# EAGLE board sensors_board (EAGLE 7.7.0)
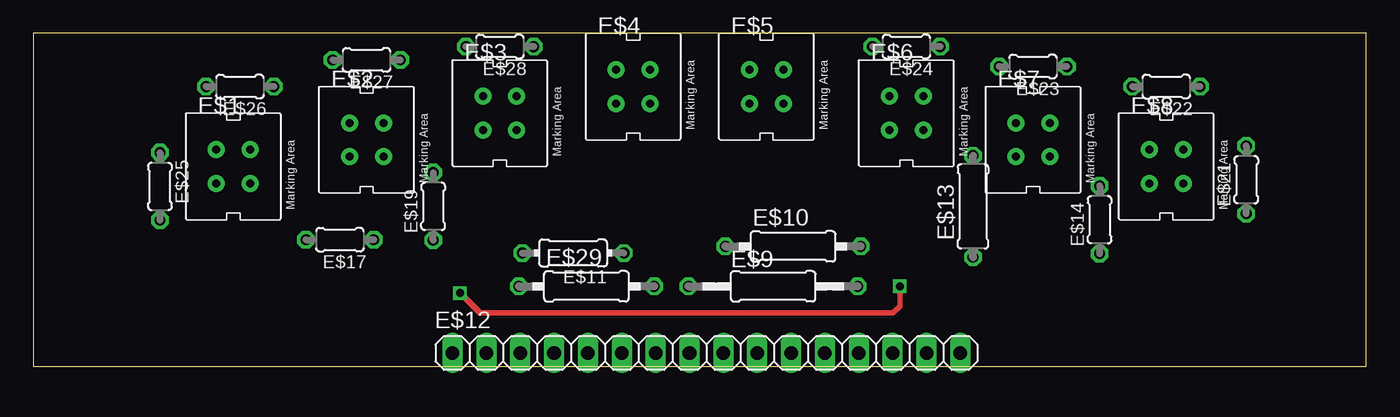
[diagram p0: board, top side]
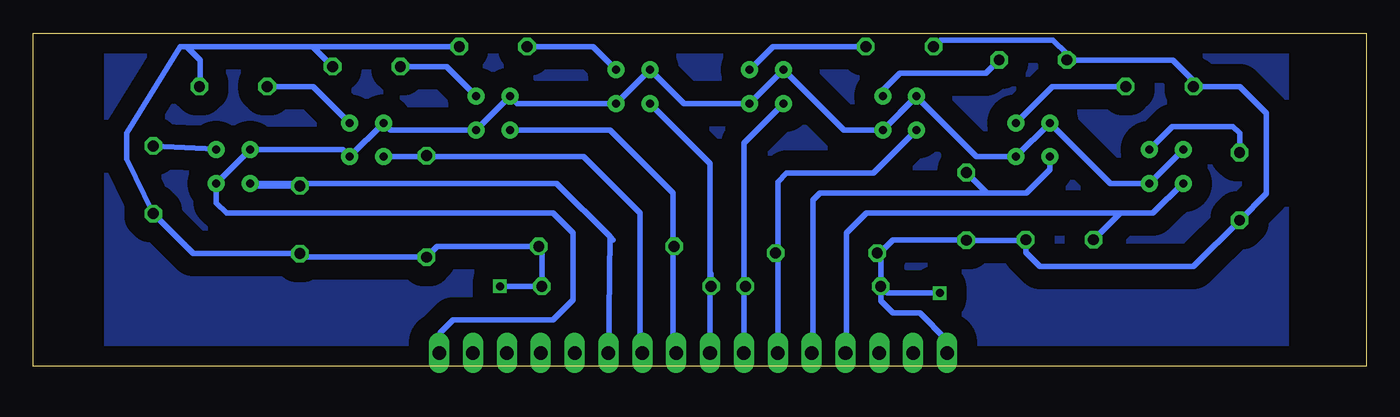
[diagram p1: board, bottom side, seen from below]

Size 100 x 25 mm. Coordinates in mm from the lower left corner, seen from the top.
Outline: 0,0 100,0 100,25 0,25 0,0
Copper layers (1*16): Top 0.035mm / dielectric 1.5mm / Bottom 0.035mm
Design rules "default": minimum track width 10mil, minimum drill 24mil, track to track 8mil, track to pad 8mil, pad to pad 8mil, via to via 8mil, smd to smd 8mil, copper to edge 40mil, drill to drill 8mil, minimum pad ring 10mil, minimum via ring 8mil, stop-mask expansion 4mil, vias tented up to drill 0mil, thermal gap 10mil

## Footprints (pad centres in the part's own frame; a part is rotated, then mirrored left to right if it is on the bottom)
4 = drill 0.61 pad 1.27: A -1.27,1.27; C 1.27,-1.27; E 1.27,1.27; K -1.27,-1.27
0207/12 = drill 0.813 octagon: 1 -6.35,0; 2 6.35,0
0207/10 = drill 0.813 octagon: 1 -5.08,0; 2 5.08,0
0204/7 = drill 0.813 octagon: 1 -3.81,0; 2 3.81,0
1X16 = drill 1.016 long: 1 -19.05,0; 2 -16.51,0; 3 -13.97,0; 4 -11.43,0; 5 -8.89,0; 6 -6.35,0; 7 -3.81,0; 8 -1.27,0; 9 1.27,0; 10 3.81,0; 11 6.35,0; 12 8.89,0; 13 11.43,0; 14 13.97,0; 15 16.51,0; 16 19.05,0
0207/7 = drill 0.813 octagon: 1 -3.81,0; 2 3.81,0
0204/5 = drill 0.813 octagon: 1 -2.54,0; 2 2.54,0

## Placement (x,y rotation side)
E$1  [4]  15,15 0 top
E$2  [4]  25,17 0 top
E$3  [4]  35,19 0 top
E$4  [4]  45,21 0 top
E$5  [4]  55,21 0 top
E$6  [4]  65.5,19 0 top
E$7  [4]  75,17 0 top
E$8  [4]  85,15 0 top
E$9  [0207/12]  55.5,6 0 top
E$10  [0207/10]  57,9 0 top
E$11  [0204/7]  40.5,8.5 180 top
E$12  [1X16]  50.5,1 0 top
E$13  [0207/7]  70.5,12 90 top
E$14  [0204/5]  80,11 90 top
E$17  [0204/5]  23,9.5 180 top
E$19  [0204/5]  30,12 90 top
E$21  [0204/5]  91,14 90 top
E$22  [0204/5]  85,21 180 top
E$23  [0204/5]  75,22.5 180 top
E$24  [0204/5]  65.5,24 180 top
E$25  [0204/5]  9.5,13.5 270 top
E$26  [0204/5]  15.5,21 180 top
E$27  [0204/5]  25,23 180 top
E$28  [0204/5]  35,24 180 top
E$29  [0207/10]  41.5,6 0 top

## Library data of the parts
E$1-E$8 = cny70
E$9-E$11 E$13 E$14 E$17 E$19 E$21-E$29 = rcl
E$12 = pinhead

## Nets
S$1: E$1.A E$1.C E$2.A E$2.C E$3.A E$3.C E$4.A E$4.C E$5.A E$5.C E$6.A E$6.C E$7.A E$7.C E$8.A E$8.C E$12.16
S$2: E$1.E E$25.1
S$3: E$2.E E$26.1
S$4: E$3.E E$27.1
S$5: E$4.E E$28.1
S$7: E$5.E E$24.2
S$8: E$6.E E$23.2
S$9: E$7.E E$22.2
S$10: E$8.E E$21.2
S$12: E$1.K E$12.4 E$17.2
S$13: E$2.K E$12.5 E$19.2
S$14: E$3.K E$11.1 E$12.6
S$15: E$4.K E$12.7 E$29.2
S$16: E$5.K E$9.1 E$12.8
S$17: E$6.K E$10.1 E$12.9
S$18: E$7.K E$12.10 E$13.2
S$19: E$8.K E$12.11 E$14.2
S$21: E$9.2 E$10.2 E$11.2 E$12.1 E$13.1 E$14.1 E$17.1 E$19.1 E$21.1 E$22.1 E$23.1 E$24.1 E$25.2 E$26.2 E$27.2 E$28.2 E$29.1

## Tracks (layer width: path | path; a pad name or v marks a point on that pad's centre or on a via)
S$1
  Bottom 0.406: E$1.A E$1.C 19.19,13.73 E$2.A E$2.C 29.23,15.73 33.5,20 34,20 E$3.C | E$3.A E$3.C | E$3.C 39.19,17.73 E$4.A E$4.C 51.19,19.73 E$5.A E$5.C 63.69,19.73 E$6.A E$6.C 73.19,17.73 E$7.A E$7.C 76.81,16.27 E$8.A E$8.C 86.27,12.27 85.5,11.5 61,11.5 59.5,10 59.5,5 61,3.5 68.5,3.5 69.5,2.5 69.5,1.05 E$12.16
S$2
  Bottom 0.406: E$1.E 14.54,18 10,18 9.5,17.5 E$25.1
S$3
  Bottom 0.406: E$2.E 23.54,21 E$26.1
S$4
  Bottom 0.406: E$27.1 28.54,22 35,22 36.27,20.73 E$3.E
S$5
  Bottom 0.406: E$28.1 44.5,24 46.23,22.27 E$4.E
S$7
  Bottom 0.406: E$24.2 58,24 E$5.E
S$8
  Bottom 0.406: E$23.2 69,22.5 E$6.E
S$9
  Bottom 0.406: E$22.2 79,21 E$7.E
S$10
  Bottom 0.406: E$21.2 86.27,16.31 E$8.E
S$12
  Bottom 0.406: E$12.4 39,1.07 39,10 37.5,11.5 18.46,11.5 | E$1.K 13.77,13.73 16,11.5 17.5,11.5 18.46,11.5 | E$17.2 18.46,11.5
S$13
  Bottom 0.406: E$12.5 41.5,1.11 41.5,12.5 41,13 28.46,13 | E$2.K 23.73,14.77 25.5,13 26.5,13 28.46,13 | E$19.2 28.46,13
S$14
  Bottom 0.406: E$3.K 36.96,14.5 43.5,14.5 44.15,13.85 44.15,9.5 44.15,8.66 | 44.15,8.66 E$12.6 | E$11.1 44.15,8.66
S$15
  Bottom 0.406: E$4.K 46.69,16.77 46.69,6.5 46.69,6.11 | 46.69,6.11 E$12.7 | E$29.2 46.69,6.11
S$16
  Bottom 0.406: E$5.K 49.23,15.23 49.23,7 | 49.23,7 E$12.8 | E$9.1 49.15,6.92 49.23,7
S$17
  Bottom 0.406: E$12.9 52,1.23 52,9.5 | 52,9.5 52,13 56.73,17.73 E$6.K | E$10.1 51.92,9.42 52,9.5
S$18
  Bottom 0.406: E$12.10 54.5,1.19 54.5,11.5 58.73,15.73 70.5,15.73 | 70.5,15.73 E$7.K 73.54,15.54 | E$13.2 70.5,15.73
S$19
  Bottom 0.406: 56.5,9.5 56.75,9.75 | 56.75,9.75 60.73,13.73 E$8.K | E$8.K 83.5,13.5 | 56.5,1.35 E$12.11 56.75,9.75 | E$14.2 83.54,13.54 E$8.K
S$20
  pour Bottom (isolate 1.5): 6,25 94.5,25 94.5,0 6,0
S$21  (via drill 0.6)
  Top 0.406: v65,6 65,4.5 64.5,4 33.5,4 v32,5.5
  Bottom 0.406: E$28.2 31.96,24.5 23.5,24.5 22.46,23.46 E$27.2 14.5,23 12.96,21.46 E$26.2 9.5,21 7.5,19 7.5,12.96 E$25.2 12.96,7.5 24.5,7.5 25.54,8.54 E$17.1 25.58,9.46 E$19.1 30.04,9.5 35.5,9.5 36.5,8.5 E$11.2 36.42,8.23 E$29.1 | E$29.1 36.42,4.92 35.5,4 33.5,4 31.5,2 31.5,1.05 E$12.1 | E$23.1 79,23.96 79,24 | E$22.1 87.5,21.04 87.5,23 88.5,24 | 79,24 E$24.1 | 88.5,24 79,24 | 88.5,24 89,24 93,17.5 93,15.54 E$21.1 | 91,11 E$21.1 | E$21.1 88,8.46 E$14.1 79.73,8.19 E$13.1 69.69,9 E$10.2 61.85,8.77 E$9.2 v65,6 | v32,5.5 35.92,5.5 E$29.1